# Altium PCB SNA.PcbDoc (part 5 of 6)
Units mm, origin at the board's own origin, x right, y up, seen from the top; angles counter-clockwise.
Board outline 122 x 98 mm, 4 copper layers (L1 Top Layer, L2 Inner 1, L3 Inner 2, L4 Bottom Layer), stack 1.588 mm thick; 466 components, 299 nets, 1366 pads, 4218 vias.
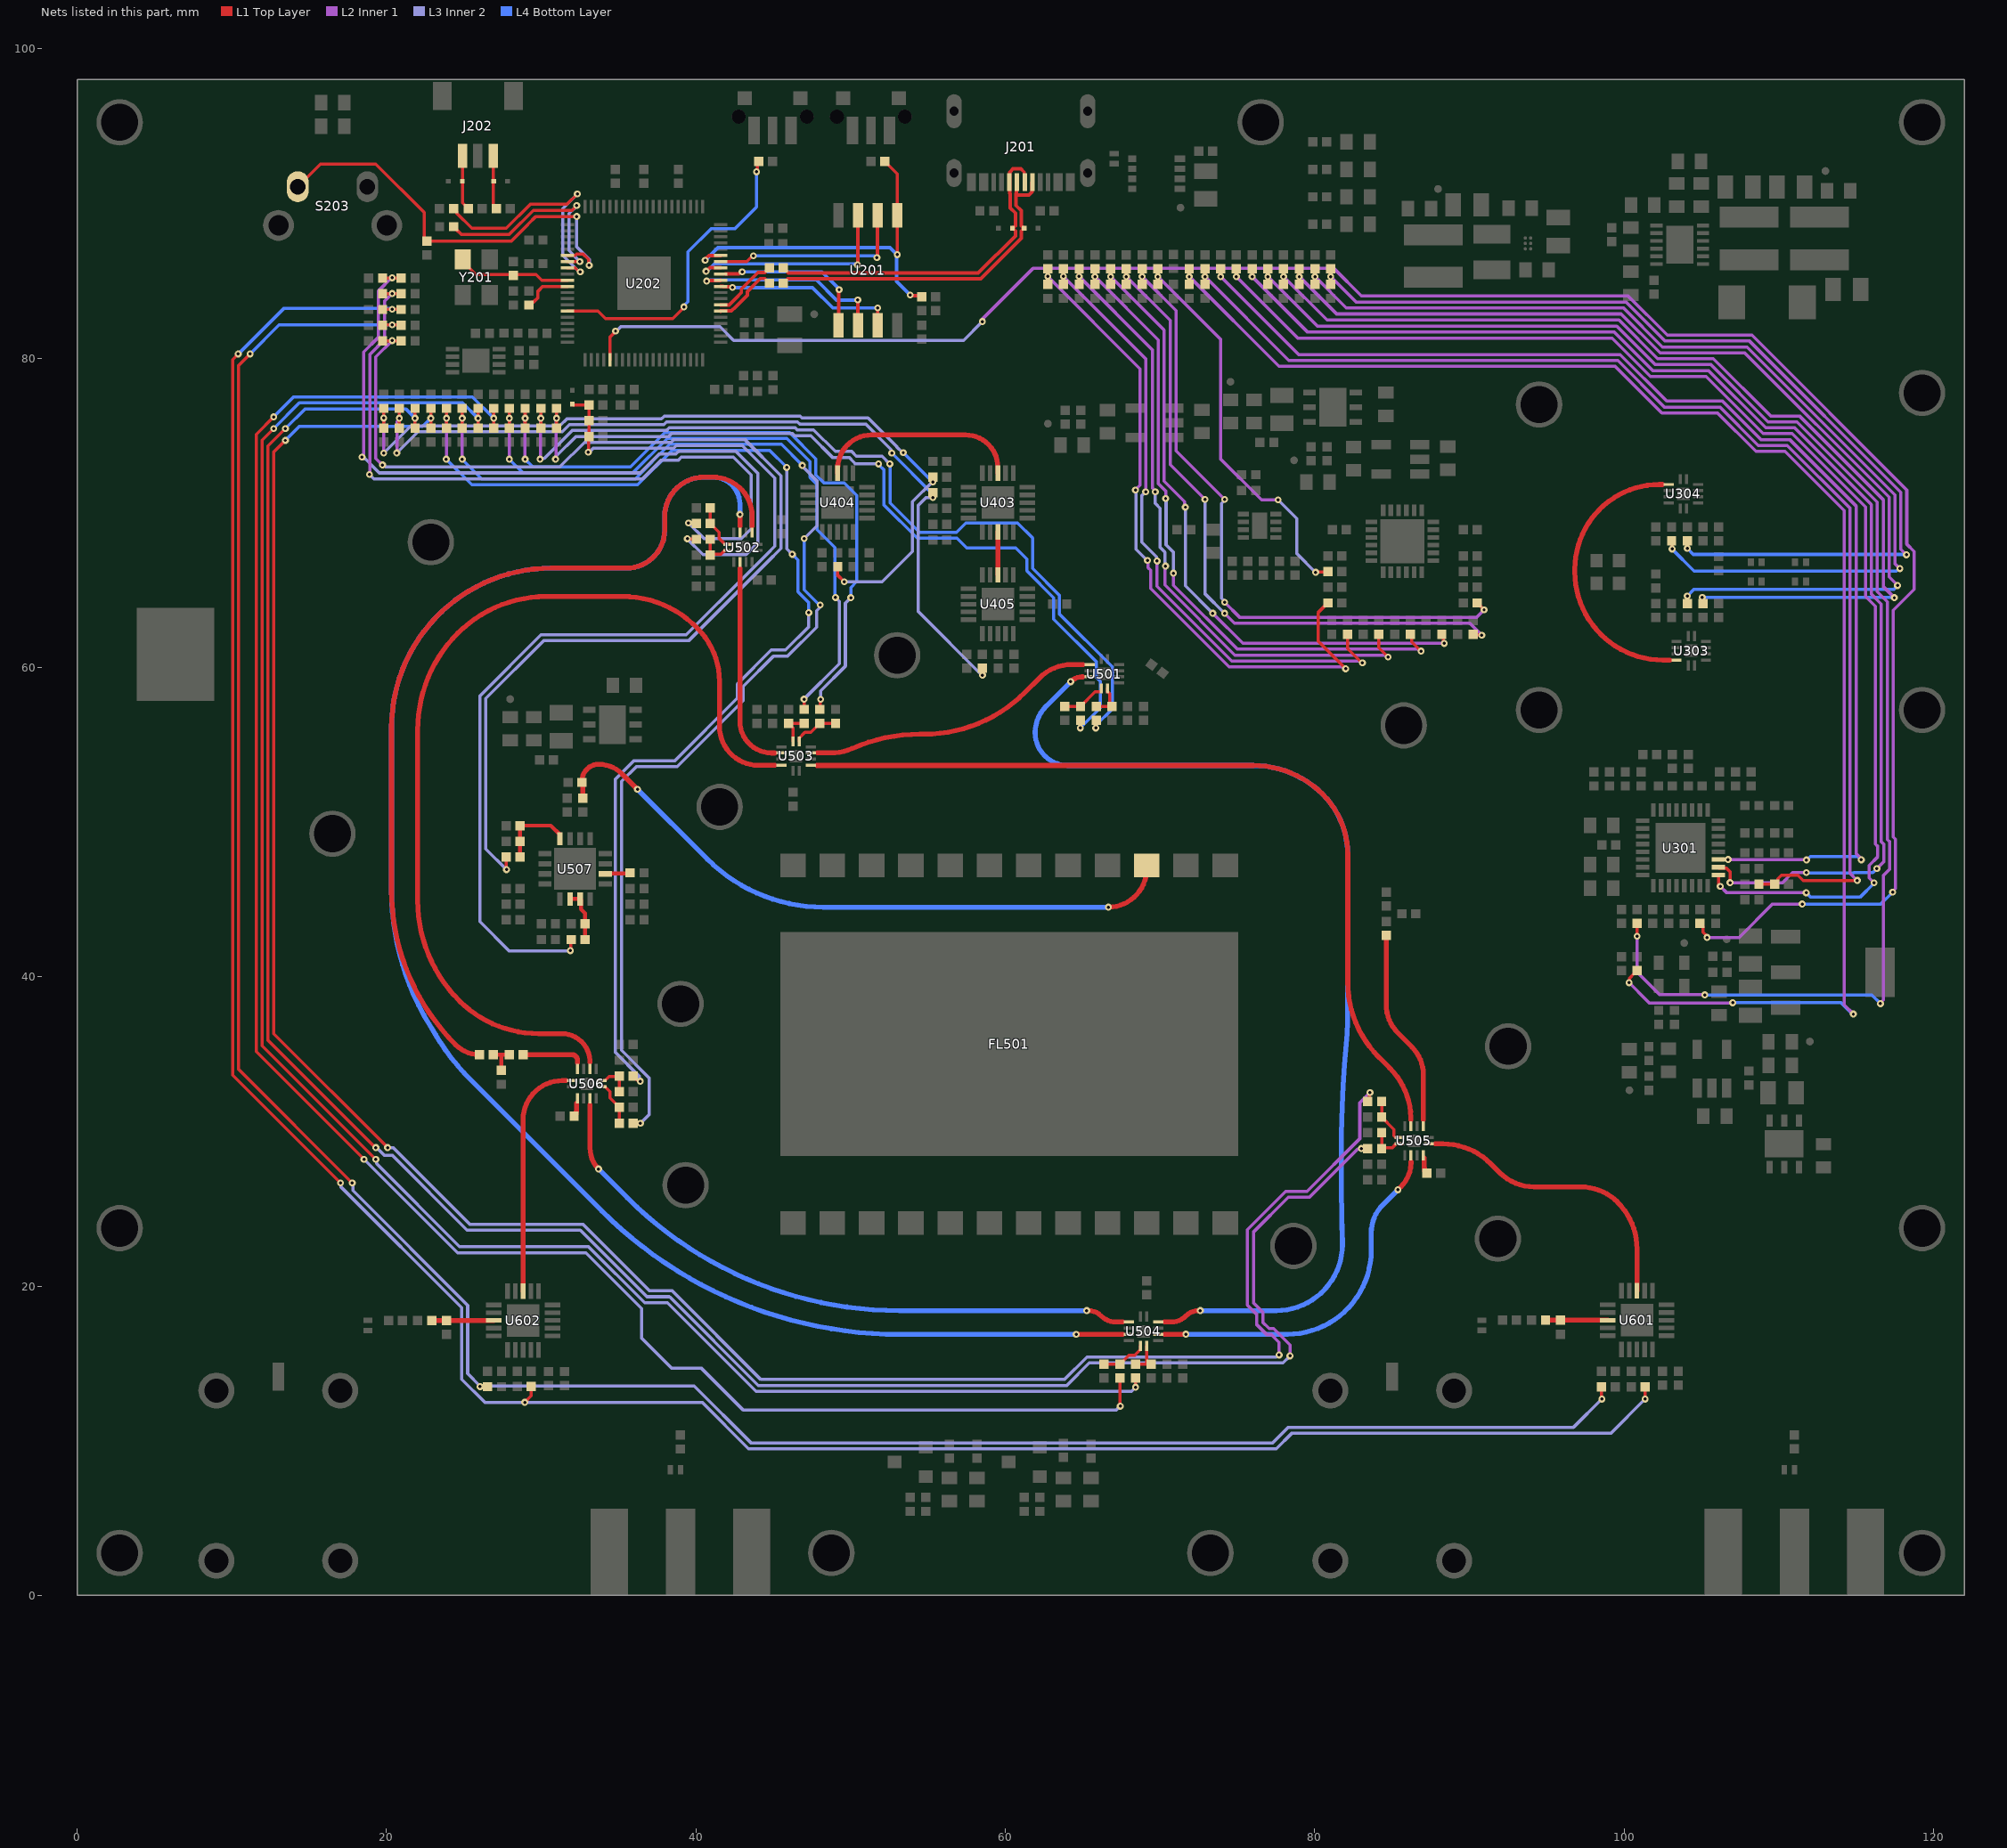
[diagram p7: the nets of this part, all layers, seen from the top]

## Via types
v1: diameter 0.45, hole 0.2, L1 Top Layer to L4 Bottom Layer, tented both sides, 4218 vias

## Nets (pads, with @x,y where several pads share a name; then routed paths per layer and width w, separated by ;. In a path a pad name is that pad's centre, name@x,y a point inside that pad or via, vN(x,y) a via of type N, cw(c..) or ccw(c..) an arc to the next point about the centre after c; other vN are vias at no path point) (continued)
NetR516_1: R516.1 R520.2 R524.2 | length 2
  L1 Top Layer w0.254: R516.1@26.908,34.962 27.416,34.962 ; R520.2@27.416,33.946 27.416,34.962 ; R524.2@27.924,34.962 27.416,34.962
NetR516_2: R516.2 U502.9 | length 58.3
  L1 Top Layer w0.32: R516.2@26.008,34.962 R516.2@26.008,34.962 cw(c26.007,37.147) 24.462,35.602 cw(c26.008,37.15) 24.461,35.603 cw(c34.482,45.61) 20.32,45.615 20.32,45.617 20.32,56.095 cw(c30.641,56.095) 30.641,66.417 35.512,66.417 ccw(c35.512,68.882) 37.978,68.882 37.978,69.76 cw(c40.518,69.76) 40.518,72.3 41.094,72.3 cw(c41.094,69.76) 43.634,69.76 43.634,69.468 43.634,69.291 43.634,69.134
NetR523_2: R523.2 U505.9 | length 12.7
  L1 Top Layer w0.32: R523.2@84.617,42.665 84.617,38.172 ccw(c87.157,38.172) 85.361,36.376 86.273,35.463 cw(c84.477,33.667) 87.017,33.667 87.017,30.765
NetR524_1: R524.1 U506.6 | length 3.9
  L1 Top Layer w0.32: R524.1@28.824,34.962 31.983,34.962 cw(c31.983,34.611) 32.335,34.611 cw(c30.898,34.447) 32.344,34.447
NetR529_2: R529.2 U505.6 | length 1
  L1 Top Layer w0.32: U505.6@87.076,28.286 87.076,27.871 87.076,27.64 87.104,27.612 87.104,27.453 R529.2@87.244,27.313
NetR530_2: R530.2 U506.9 | length 0.9
  L1 Top Layer w0.32: R530.2@32.123,30.988 32.262,31.127 32.262,31.289 32.289,31.315 U506.9@32.289,31.819
NetR539_1: R539.1 U507.10 | length 1.6
  L1 Top Layer w0.254: U507.10@34.136,46.652 34.172,46.687 35.707,46.687 R539.1@35.742,46.723
NetR605_1: R605.1 R607.2 U601.13 | length 4
  L1 Top Layer w0.32: R607.2@94.915,17.792 U601.13@98.924,17.792
NetR606_1: R606.1 R608.2 U602.13 | length 4
  L1 Top Layer w0.32: R608.2@22.915,17.78 R606.1@23.887,17.78 ; R606.1@23.887,17.78 U602.13@26.924,17.78
NetU303_6: U303.6 U304.9 | length 18.3
  L1 Top Layer w0.32: 102.458,71.826 102.3,71.826 102.281,71.826 ccw(c102.281,66.354) 96.81,66.354 96.81,66.169 ccw(c102.502,66.169) 102.502,60.476 102.808,60.476 102.947,60.476
NetU403_3: U403.3 U405.8 | length 2.8
  L1 Top Layer w0.32: U405.8@59.512,65.985 U403.3@59.512,68.753
NetU403_13: U403.13 U404.8 | length 13.5
  L1 Top Layer w0.32: U404.8@49.154,72.553 49.154,72.834 cw(c51.353,72.834) 49.205,73.303 cw(c51.353,72.834) 51.353,75.033 57.419,75.033 cw(c57.419,72.94) 59.204,74.034 cw(c57.419,72.94) 59.512,72.94 U403.13@59.512,72.553
NetU501_9: U501.9 U503.11 | length 18.7
  L1 Top Layer w0.32: 47.858,54.468 48.701,54.468 ccw(c48.701,57.93) 50.093,54.761 cw(c54.486,44.758) 54.486,55.683 54.741,55.683 54.742,55.683 ccw(c54.742,64.914) 61.27,58.387 62.198,59.316 cw(c64.308,57.208) 64.308,60.19 64.87,60.19 65.02,60.19
NetU501_11: U501.11 U504.6 | length 68.9
  L1 Top Layer w0.32: v1(64.221,59.08) cw(c64.971,58.33) 64.971,59.39 64.999,59.39 ; 70.278,17.682 70.729,17.682 ccw(c70.729,18.998) 71.66,18.067 cw(c72.504,17.223) v1@72.504,18.417
  L4 Bottom Layer w0.32: v1(64.221,59.08) 62.631,57.49 ccw(c64.335,55.783) 61.923,55.783 ccw(c64.044,55.783) 64.047,53.661 76.004,53.661 cw(c76.007,47.289) 80.511,51.796 cw(c76.613,47.893) 80.513,51.795 cw(c76.613,47.893) 82.129,47.887 82.129,37.764 cw(c57.913,37.764) 82.035,35.637 cw(c81.716,35.665) 82.035,35.633 ccw(c140.911,29.727) 81.77,31.628 ccw(c213.359,27.397) 81.786,22.699 cw(c81.466,22.689) 81.786,22.689 cw(c77.508,22.695) 77.508,18.417 v1(72.6,18.417)
NetU502_4: U502.4 U503.4 | length 13.3
  L1 Top Layer w0.32: 42.836,66.403 42.836,66.241 42.836,62.75 42.836,56.522 ccw(c44.891,56.522) 44.891,54.467 45.078,54.467
NetU502_11: U502.11 U504.11 | length 106.4
  L1 Top Layer w0.32: v1(42.836,69.897) 42.836,69.136 ccw(c42.672,69.412) 42.839,69.138 ; v1(64.571,16.877) 67.563,16.877 67.567,16.876
  L4 Bottom Layer w0.32: 22.753,36.936 cw(c36.998,45.609) 22.752,36.937 cw(c36.998,45.609) 20.32,45.616 20.32,56.095 cw(c30.641,56.095) 30.641,66.417 35.512,66.417 ccw(c35.512,68.882) 37.978,68.882 37.978,69.76 cw(c40.518,69.76) 40.518,72.3 41.094,72.3 cw(c41.094,70.558) 42.836,70.558 v1(42.836,69.897) ; 22.753,36.935 cw(c-129.68,-56.441) 23.171,36.25 ccw(c35.64,43.619) 23.171,36.249 ccw(c35.64,43.619) 25.409,33.367 33.906,24.87 ccw(c53.195,44.148) 53.195,16.877 53.205,16.877 v1(64.571,16.877)
NetU503_6: U503.6 U506.4 | length 63.7
  L1 Top Layer w0.32: 24.605,62.212 ccw(c30.859,55.959) 22.015,55.959 22.015,55.958 22.015,44.933 ccw(c31.186,44.931) 24.7,38.447 ccw(c29.823,43.568) 29.829,36.324 31.328,36.324 cw(c31.328,34.505) 33.144,34.611 cw(c31.328,34.505) 33.147,34.461 ; 24.606,62.213 cw(c30.332,56.487) 30.332,64.585 30.334,64.585 35.253,64.585 cw(c35.259,57.874) 40.094,62.528 cw(c36.678,59.103) 41.515,59.1 41.515,56.194 ccw(c44.042,56.194) 44.042,53.667 44.947,53.667 45.092,53.667
NetU503_9: U503.9 U505.11 | length 55.8
  L1 Top Layer w0.32: 47.832,53.661 47.997,53.661 76.005,53.661 76.006,53.661 ; 76.006,53.663 cw(c76.01,47.294) 80.513,51.799 cw(c76.613,47.895) 82.131,47.889 82.131,39.654 ; 82.131,39.652 82.131,39.651 ccw(c88.976,39.644) 84.136,34.804 84.137,34.803 84.831,34.109 84.832,34.108 cw(c81.488,30.764) 86.215,30.921 cw(c81.488,30.764) 86.217,30.762
NetU504_4: U504.4 U505.4 | length 23
  L1 Top Layer w0.32: 70.295,16.877 70.953,16.877 71.659,16.877 v1(71.671,16.889) ; v1(85.373,26.231) 85.559,26.417 ccw(c83.955,28.021) 86.218,27.871 ccw(c83.955,28.021) 86.223,28.016 cw(c86.517,28.121) 86.222,28.02
  L4 Bottom Layer w0.32: v1(71.671,16.889) 78.225,16.889 ccw(c78.225,22.311) 83.647,22.311 83.647,23.453 cw(c86.187,23.453) 84.391,25.249 v1(85.373,26.231)
NetU504_9: U504.9 U506.11 | length 41
  L1 Top Layer w0.32: 33.149,31.723 33.15,31.563 33.15,31.561 33.15,28.911 ccw(c35.046,28.911) v1(33.706,27.57) ; v1@65.355,18.419 cw(c65.355,17.225) 66.199,18.069 ccw(c67.13,19) 67.13,17.683 67.581,17.683
  L4 Bottom Layer w0.32: v1(33.706,27.57) 35.579,25.696 35.581,25.695 ccw(c53.148,43.262) 53.148,18.419 53.149,18.419 v1(65.259,18.419)
NetU505_7: U505.7 U601.8 | length 18.9
  L1 Top Layer w0.32: 87.795,29.196 87.942,29.196 88.269,29.196 88.272,29.196 cw(c88.271,24.799) 91.38,27.908 91.381,27.907 91.954,27.334 91.956,27.333 ccw(c94.172,29.549) 94.172,26.415 94.173,26.415 97.185,26.415 97.186,26.415 cw(c97.188,23.046) 99.568,25.43 cw(c96.545,22.401) 99.569,25.428 cw(c96.545,22.401) 100.824,22.398 100.824,21.213 U601.8@100.824,19.692
NetU506_7: U506.7 U602.8 | length 15.3
  L1 Top Layer w0.32: U602.8@28.824,19.68 28.824,30.747 cw(c31.364,30.747) 31.364,33.287 31.584,33.287
QSPI_SCLK: U201.6 U202.71 | length 12.9
  L1 Top Layer w0.228: v1(40.689,84.98) 40.73,85.021 41.578,85.021 U202.71@41.591,85.035 ; v1(50.455,83.757) 50.466,83.746 50.466,82.136 U201.6@50.477,82.125
  L4 Bottom Layer w0.228: v1(40.689,84.98) 40.731,85.022 40.889,85.022 40.921,85.055 47.787,85.055 49.085,83.757 v1(50.455,83.757)
QSPI_SD0: U201.5 U202.72 | length 10.2
  L1 Top Layer w0.228: U202.72@41.903,85.435 42.564,85.435 42.783,85.435 42.923,85.575 v1(42.983,85.575) ; U201.5@49.207,82.125 49.231,82.148 49.231,84.398 v1(49.254,84.421)
  L4 Bottom Layer w0.228: v1(42.983,85.575) 48.14,85.575 49.254,84.461 v1(49.254,84.421)
QSPI_SD1: U201.2 U202.74 | length 13.1
  L1 Top Layer w0.228: U202.74@41.591,86.235 43.281,86.235 43.655,86.609 v1(43.708,86.609) ; v1(51.699,86.499) 51.723,86.523 51.723,89.201 U201.2@51.747,89.225
  L4 Bottom Layer w0.228: v1(43.708,86.609) 51.528,86.609 51.639,86.499 v1(51.699,86.499)
QSPI_SD2: U201.3 U202.73 | length 14.3
  L1 Top Layer w0.228: v1(40.653,85.611) 40.665,85.611 40.89,85.835 U202.73@41.591,85.835 ; v1(50.44,86.023) 50.459,86.041 50.459,89.206 U201.3@50.477,89.225
  L4 Bottom Layer w0.228: v1(40.653,85.611) 40.709,85.611 41.189,86.091 42.564,86.091 50.311,86.091 50.379,86.023 v1(50.44,86.023)
QSPI_SD3: U201.7 U202.70 | length 11.8
  L1 Top Layer w0.228: U202.70@41.591,84.635 41.747,84.635 41.761,84.621 42.239,84.621 42.299,84.561 v1(42.359,84.561) ; v1(51.742,83.241) 51.745,83.238 51.745,82.127 U201.7@51.747,82.125
  L4 Bottom Layer w0.228: v1(42.359,84.561) 42.564,84.561 47.519,84.561 48.839,83.241 v1(51.742,83.241)
QSPI_SS: R202.1 R206.1 U201.1 U202.75 | length 24.3
  L1 Top Layer w0.203: R202.1@52.208,92.71 53.017,91.901 U201.1@53.017,89.225
  L1 Top Layer w0.228: v1(40.596,86.317) 40.639,86.36 40.639,86.442 40.832,86.635 U202.75@41.591,86.635 ; v1(53.006,86.688) 53.012,86.693 53.012,89.219 U201.1@53.017,89.225 ; v1(53.848,84.074) 53.891,84.031 54.52,84.031 R206.1@54.591,83.96
  L4 Bottom Layer w0.228: v1(40.596,86.317) 41.431,87.152 42.564,87.152 52.547,87.152 53.006,86.692 v1(53.006,86.688) 52.975,86.656 52.975,84.947 v1(53.848,84.074)
RF_Attenuator.D0: C407.2 R232.2 R407.2 | length 42.4
  L1 Top Layer w0.203: C407.2@68.834,84.761 v1(68.834,85.269) R232.2@68.834,85.777 ; R407.2@90.492,64.167 v1(90.942,63.717)
  L2 Inner 1 w0.203: v1(68.834,85.269) 71.034,83.069 71.034,74 v1(74.168,70.866) ; v1(74.168,64.214) 75.136,63.246 90.471,63.246 v1(90.942,63.717)
  L3 Inner 2 w0.203: v1(74.168,64.214) 74.168,64.28 73.974,64.474 73.974,70.605 74.168,70.799 v1(74.168,70.866)
RF_Attenuator.D1: C406.2 R233.2 R406.2 | length 43.2
  L1 Top Layer w0.203: C406.2@67.818,84.761 v1(67.818,85.269) R233.2@67.818,85.777 ; R406.2@90.238,62.135 90.268,62.105 90.766,62.105 v1(90.795,62.076)
  L2 Inner 1 w0.203: v1(67.818,85.269) 70.653,82.434 70.653,73.111 v1(72.898,70.866) ; v1(74.168,63.5) 74.168,63.495 74.798,62.865 90.018,62.865 v1@90.795,62.088
  L3 Inner 2 w0.203: v1@72.893,70.861 72.893,64.769 74.163,63.5 v1(74.168,63.5)
RF_Attenuator.D2: C405.2 R234.2 R405.2 | length 41.9
  L1 Top Layer w0.203: C405.2@66.802,84.761 v1(66.802,85.269) R234.2@66.802,85.777 ; R405.2@88.206,62.135 88.319,62.022 88.319,61.597 v1(88.366,61.55)
  L2 Inner 1 w0.203: v1(66.802,85.269) 70.258,81.813 70.258,72.041 71.581,70.719 71.581,70.405 v1(71.628,70.358) ; v1(73.406,63.5) 75.348,61.558 v1@88.359,61.558
  L3 Inner 2 w0.203: v1(71.628,70.358) 71.628,65.278 v1(73.406,63.5)
RF_Attenuator.D3: C404.2 R235.2 R404.2 | length 42.2
  L1 Top Layer w0.203: C404.2@65.786,84.761 v1(65.786,85.269) R235.2@65.786,85.777 ; R404.2@86.174,62.135 86.267,62.042 86.267,61.649 v1(86.863,61.053)
  L2 Inner 1 w0.203: v1(65.786,85.269) 69.877,81.178 69.877,71.883 70.365,71.396 v1@70.365,70.923 ; v1(70.86,66.091) 70.86,65.315 74.998,61.177 86.673,61.177 86.796,61.053 v1(86.863,61.053)
  L3 Inner 2 w0.203: v1(70.356,70.915) 70.386,70.886 70.386,67.927 70.86,67.453 v1(70.86,66.091)
RF_Attenuator.D4: C403.2 R236.2 R403.2 | length 41.4
  L1 Top Layer w0.203: C403.2@64.77,84.761 R236.2@64.77,85.777 ; R403.2@84.142,62.135 84.142,61.27 v1(84.739,60.672)
  L2 Inner 1 w0.203: v1(64.77,85.273) 64.77,85.269 69.496,80.543 69.496,71.618 69.693,71.421 v1(69.693,71.354) ; v1(70.349,66.549) 70.307,66.507 70.307,65.329 74.84,60.796 84.549,60.796 84.673,60.672 v1(84.739,60.672)
  L3 Inner 2 w0.203: v1@69.692,71.353 69.692,70.598 70.005,70.286 70.005,67.766 70.322,67.449 70.322,66.576 v1(70.349,66.549)
RF_Attenuator.D5: C402.2 R237.2 R402.2 | length 41.4
  L1 Top Layer w0.203: C402.2@63.754,84.761 R237.2@63.754,85.777 ; R402.2@82.11,62.135 82.11,61.224 83.042,60.291 v1(83.077,60.291)
  L2 Inner 1 w0.203: v1(63.754,85.273) 63.754,85.269 69.088,79.935 69.088,71.378 v1(69.066,71.356) ; v1(69.808,66.88) 69.794,66.866 69.794,65.249 74.628,60.415 82.887,60.415 83.01,60.291 v1(83.077,60.291)
  L3 Inner 2 w0.203: v1(69.066,71.356) 68.818,71.108 68.818,68.089 69.76,67.146 69.76,66.927 v1(69.808,66.88)
RF_Attenuator.D6: C401.2 R238.2 R401.2 | length 44.2
  L1 Top Layer w0.203: C401.2@62.738,84.761 R238.2@62.738,85.777 ; R401.2@80.84,64.167 80.205,63.532 80.205,61.702 v1(81.997,59.91)
  L2 Inner 1 w0.203: v1(62.738,85.273) 62.738,85.269 68.707,79.3 68.707,71.773 v1(68.402,71.468) ; v1(69.181,66.918) 69.228,66.87 69.228,66.445 69.387,66.286 69.387,65.11 74.463,60.034 81.806,60.034 81.93,59.91 v1(81.997,59.91)
  L3 Inner 2 w0.203: v1(68.402,71.468) 68.437,71.433 68.437,67.644 69.163,66.918 v1(69.181,66.918)
RF_Attenuator.LE: C408.2 R231.2 R408.2 | length 25.8
  L1 Top Layer w0.203: C408.2@69.85,84.703 C408.2@69.85,84.761 v1(69.85,85.269) R231.2@69.85,85.719 ; v1(80.05,66.148) 80.076,66.174 80.814,66.174 R408.2@80.84,66.199
  L2 Inner 1 w0.203: v1(69.85,85.269) 73.901,81.218 73.901,73.482 76.554,70.83 77.616,70.83 v1(77.621,70.835)
  L3 Inner 2 w0.203: v1(77.621,70.835) 78.775,69.681 78.834,69.622 78.834,68.156 78.834,67.364 v1(80.05,66.148)
RF_COUPLED: C522.1 FL501.15 R535.2 | length 43.2
  L1 Top Layer w0.32: C522.1@32.694,51.549 32.694,52.507 ccw(c32.636,52.507) R535.2@32.636,52.565 32.633,52.705 cw(c33.717,52.655) 33.717,53.74 cw(c33.717,51.615) 35.221,53.116 v1(36.219,52.118) ; v1(66.657,44.502) ccw(c66.657,46.977) 69.132,46.977 FL501.15@69.132,47.2
  L4 Bottom Layer w0.32: v1(36.219,52.118) 40.721,47.616 40.722,47.615 ccw(c48.238,55.131) 48.238,44.502 48.239,44.502 v1(66.657,44.502)
RF_DET_EN: C524.2 R536.2 R538.1 U507.16 | length 5.1
  L1 Top Layer w0.254: R538.1@28.63,47.739 R536.2@28.63,48.755 C524.2@28.63,49.771 30.617,49.771 31.211,49.177 U507.16@31.211,48.927
RF_DET_OUT: C523.2 R537.1 U507.6 U507.7 | length 3.4
  L1 Top Layer w0.254: U507.6@31.861,45.027 U507.7@32.511,45.027 32.559,44.979 32.559,44.375 32.832,44.102 C523.2@32.832,43.421 R537.1@32.832,42.405
RF_Detector.EN: C528.2 R210.1 R538.2 | length 77.6
  L1 Top Layer w0.203: C528.2@19.561,81.11 C528.2@19.746,81.11 ; C528.2@19.928,81.11 19.937,81.119 20.358,81.119 v1(20.367,81.127) 20.376,81.119 20.935,81.119 R210.1@20.944,81.11 ; R538.2@27.73,47.739 27.741,47.728 27.741,46.939 v1(27.751,46.928)
  L2 Inner 1 w0.203: 19.307,76.326 19.307,73.518 v1(19.74,73.085) ; 19.308,76.327 19.308,80.068 v1(20.367,81.127)
  L3 Inner 2 w0.203: v1(19.74,73.085) 19.807,73.085 19.936,72.956 31.198,72.956 32.794,74.551 38.396,74.551 38.576,74.731 43.15,74.731 45.491,72.39 45.491,67.69 44.561,66.759 44.042,66.241 39.523,61.722 30.145,61.722 26.416,57.993 26.416,48.26 27.748,46.928 v1(27.751,46.928)
RF_Detector.OUT: C204.2 C527.2 D205.1 R211.1 R537.2 | length 66.7
  L1 Top Layer w0.203: v1(31.877,41.689) 31.905,41.716 31.905,42.377 R537.2@31.932,42.405 ; D205.1@32.004,77.02 32.062,76.962 R211.1@33.078,76.962 C527.2@33.078,75.946 C204.2@33.078,74.93 33.06,74.912 33.06,73.935 v1(33.043,73.918)
  L3 Inner 2 w0.203: v1(31.877,41.689) 31.844,41.656 27.94,41.656 26.035,43.561 26.035,58.15 29.988,62.103 39.366,62.103 43.503,66.241 44.561,67.298 45.101,67.838 45.101,72.241 42.992,74.35 38.733,74.35 38.553,74.17 33.362,74.17 33.109,73.918 v1(33.043,73.918)
RF_SRC.CE: C303.2 R220.1 R303.1 R304.2 | length 80
  L1 Top Layer w0.203: C303.2@72.898,84.761 v1(72.898,85.269) R220.1@72.898,85.777 ; R304.2@108.705,45.987 R303.1@109.721,45.987 109.92,46.186 109.92,46.325 110.162,46.567 111.231,46.567 111.569,46.228 v1(115.062,46.228)
  L2 Inner 1 w0.203: v1(72.898,85.269) 78.327,79.84 99.584,79.84 102.589,76.835 106.187,76.835 108.671,74.351 110.537,74.351 114.603,70.285 114.603,46.687 v1(115.062,46.228)
RF_SRC.CLK: R218.1 U301.1 | length 83.8
  L1 Top Layer w0.203: v1(74.93,85.269) R218.1@74.93,85.777 ; U301.1@106.087,46.582 106.087,45.963 v1(106.205,45.845)
  L2 Inner 1 w0.203: v1(74.93,85.269) 78.907,81.292 99.209,81.292 101.69,78.812 105.288,78.812 108.987,75.113 110.853,75.113 115.596,70.37 115.596,64.583 116.235,63.943 116.235,48.576 116.388,48.423 116.388,47.76 115.828,47.199 115.828,46.392 v1(116.149,46.07) ; v1(106.205,45.845) 106.212,45.845 106.63,45.427 v1(111.762,45.427)
  L4 Bottom Layer w0.203: v1(111.762,45.427) 112.049,45.139 115.238,45.139 116.149,46.051 v1(116.149,46.07)
RF_SRC.DATA: R217.1 U301.2 | length 82.2
  L1 Top Layer w0.203: v1(75.946,85.269) R217.1@75.946,85.777 ; U301.2@106.087,47.082 106.135,47.033 106.605,47.033 106.837,46.802 v1(106.837,46.085)
  L2 Inner 1 w0.203: v1(75.946,85.269) 79.539,81.676 99.364,81.676 101.848,79.193 105.446,79.193 109.144,75.494 111.011,75.494 115.977,70.528 115.977,64.74 116.616,64.101 116.616,48.734 116.769,48.581 116.769,47.427 v1(116.332,46.99) ; v1(106.837,46.085) 106.858,46.063 110.215,46.063 110.888,46.736 v1(111.775,46.736)
  L4 Bottom Layer w0.203: v1(111.775,46.736) 111.795,46.716 114.836,46.716 114.853,46.732 116.074,46.732 v1(116.332,46.99)
RF_SRC.LD: C301.2 R221.1 R301.2 | length 98.7
  L1 Top Layer w0.203: C301.2@71.882,84.761 v1(71.882,85.269) R221.1@71.882,85.777 ; v1(100.314,39.618) 100.355,39.66 100.355,39.92 100.633,40.198 100.633,40.201 R301.2@100.831,40.399
  L2 Inner 1 w0.203: v1(71.882,85.269) 77.68,79.471 78.157,79.471 78.169,79.459 99.426,79.459 102.431,76.454 106.029,76.454 108.513,73.97 110.38,73.97 114.21,70.14 114.21,38.19 v1(114.808,37.592) ; v1(100.314,39.618) 101.453,38.479 101.618,38.314 v1@107.009,38.314
  L4 Bottom Layer w0.203: v1(107.009,38.316) 114.017,38.316 114.741,37.592 v1(114.808,37.592)
RF_SRC.LE: R219.1 U301.3 | length 80.2
  L1 Top Layer w0.203: v1(73.914,85.269) R219.1@73.914,85.777 ; U301.3@106.088,47.581 v1(106.714,47.58)
  L2 Inner 1 w0.203: v1(73.914,85.269) 78.962,80.221 99.742,80.221 102.747,77.216 106.345,77.216 108.829,74.732 110.695,74.732 114.984,70.443 114.984,47.964 115.323,47.625 v1(115.323,47.559) ; v1(106.714,47.58) 106.729,47.565 111.768,47.565 v1(111.783,47.55)
  L4 Bottom Layer w0.203: v1(111.783,47.55) 111.802,47.55 112.025,47.774 115.081,47.774 115.296,47.559 v1(115.323,47.559)
RF_SRC.MUX: R314.1 U202.45 | length 135.1
  L1 Top Layer w0.203: U202.45@34.441,79.885 34.441,81.357 34.801,81.717 v1(34.801,81.747) ; R314.1@104.895,43.447 105.094,43.249 105.094,42.871 105.355,42.61 v1(105.355,42.544)
  L2 Inner 1 w0.203: v1(58.506,82.359) 58.553,82.407 58.553,82.567 61.778,85.792 81.242,85.792 83.006,84.029 100.245,84.029 102.795,81.479 108.259,81.479 118.263,71.475 118.263,67.971 118.745,67.489 118.745,65.039 117.395,63.689 117.395,49.033 117.531,48.897 117.531,45.708 117.348,45.525 v1(117.348,45.466) ; v1(105.355,42.544) 105.362,42.536 107.425,42.536 109.593,44.704 v1(111.506,44.704)
  L3 Inner 2 w0.203: v1(34.801,81.747) 34.868,81.747 35.147,82.026 41.556,82.026 42.434,81.149 42.564,81.149 57.295,81.149 v1(58.506,82.359)
  L4 Bottom Layer w0.203: v1(111.506,44.704) 116.586,44.704 v1(117.348,45.466)
RF_SRC.RFOUT_EN: C330.2 R216.1 R302.2 | length 99.2
  L1 Top Layer w0.203: C330.2@76.962,84.761 v1(76.962,85.269) R216.1@76.962,85.777 ; v1(100.83,42.615) R302.2@100.831,43.447
  L2 Inner 1 w0.203: v1(76.962,85.269) 80.171,82.06 99.519,82.06 102.005,79.574 105.604,79.574 109.302,75.875 111.169,75.875 116.358,70.686 116.358,64.898 117.014,64.242 117.014,48.875 117.15,48.739 117.15,46.953 116.75,46.552 116.75,38.505 116.564,38.319 v1(116.564,38.263) ; v1(100.83,42.615) 100.833,42.612 100.833,40.299 102.272,38.86 105.175,38.86 v1(105.206,38.829)
  L4 Bottom Layer w0.203: v1(105.206,38.829) 115.998,38.829 v1(116.564,38.263)
RF_SW_CPLR_1.C1: C508.2 R252.2 R503.1 | length 51
  L1 Top Layer w0.203: C508.2@19.928,85.174 19.937,85.183 20.358,85.183 v1(20.367,85.191) 20.376,85.183 20.935,85.183 R252.2@20.944,85.174 ; v1(39.44,68.323) 39.476,68.286 R503.1@40.017,68.286
  L2 Inner 1 w0.203: v1(18.411,73.592) 18.411,73.659 18.52,73.768 18.52,80.393 19.482,81.355 19.482,84.349 20.324,85.191 v1(20.367,85.191)
  L3 Inner 2 w0.203: v1(18.411,73.592) 18.477,73.592 18.594,73.475 18.637,73.475 19.537,72.575 36.364,72.575 36.37,72.581 36.397,72.581 37.605,73.789 38.711,73.789 38.891,73.969 42.578,73.969 43.987,72.56 43.987,69.291 43.987,68.039 43.234,67.287 41.511,67.287 40.448,67.287 39.44,68.296 v1(39.44,68.323)
RF_SW_CPLR_1.C1_LV: R503.2 R506.1 U502.2 | length 2.1
  L1 Top Layer w0.203: R503.2@40.917,68.286 40.917,67.352 R506.1@40.917,67.27 40.967,67.32 41.511,67.32 41.618,67.32 U502.2@41.862,67.564
RF_SW_CPLR_1.C2: C504.2 R253.2 R504.1 | length 47.9
  L1 Top Layer w0.203: C504.2@19.928,84.158 19.937,84.167 20.358,84.167 v1(20.367,84.175) 20.376,84.167 20.935,84.167 R253.2@20.944,84.158 ; v1(39.518,69.337) 39.553,69.302 R504.1@40.017,69.302
  L2 Inner 1 w0.203: v1(18.891,72.477) 18.915,72.501 18.915,80.232 19.863,81.18 19.863,83.671 v1(20.367,84.175)
  L3 Inner 2 w0.203: v1(18.891,72.477) 19.174,72.194 36.522,72.194 36.528,72.2 36.555,72.2 37.763,73.408 38.869,73.408 39.049,73.588 42.42,73.588 43.569,72.439 43.569,69.291 43.569,68.969 42.926,68.326 40.529,68.326 v1(39.518,69.337)
RF_SW_CPLR_1.C2_LV: R504.2 R508.1 U502.1 | length 3
  L1 Top Layer w0.203: R508.1@40.917,70.318 R504.2@40.917,69.302 41.497,68.723 41.497,68.333 41.511,68.319 41.864,67.966 U502.1@42.086,67.966
RF_SW_CPLR_2.C1: C507.2 R250.2 R501.1 | length 56.9
  L1 Top Layer w0.203: C507.2@29.972,75.479 v1(29.972,76.114) R250.2@29.972,76.749 ; v1(65.84,56.082) 65.857,56.099 65.857,56.555 R501.1@65.874,56.572
  L2 Inner 1 w0.203: v1(29.924,73.46) 29.962,73.498 v1@29.962,76.104
  L3 Inner 2 w0.203: v1(29.924,73.46) 29.971,73.507 30.192,73.507 31.998,75.313 38.08,75.313 38.26,75.493 46.413,75.493 46.547,75.359 47.606,75.359 49.003,73.962 50.059,73.962 50.362,73.659 52.022,73.659 v1(52.529,73.152)
  L4 Bottom Layer w0.203: v1(52.529,73.152) 52.55,73.131 52.55,70.64 54.455,68.735 56.832,68.735 57.435,69.338 60.791,69.338 61.761,68.368 61.761,66.4 63.5,64.661 63.5,63.449 66.914,60.035 66.914,57.313 65.887,56.286 65.887,56.13 v1(65.84,56.082)
RF_SW_CPLR_2.C1_LV: R501.2 R505.1 U501.2 | length 2.3
  L1 Top Layer w0.203: R501.2@65.874,57.472 R505.1@66.89,57.472 66.743,57.619 66.743,58.065 66.743,58.296 66.622,58.417 66.596,58.417 66.595,58.419 U501.2@66.595,58.64
RF_SW_CPLR_2.C2: C503.2 R251.2 R502.1 | length 53.8
  L1 Top Layer w0.203: C503.2@30.988,75.479 v1(30.988,76.114) R251.2@30.988,76.749 ; v1(64.847,56.084) 64.852,56.09 64.852,56.566 R502.1@64.858,56.572
  L2 Inner 1 w0.203: v1(30.917,73.46) 30.953,73.495 30.953,76.079 v1(30.988,76.114)
  L3 Inner 2 w0.203: v1(30.917,73.46) 30.964,73.507 30.964,73.652 32.244,74.932 38.238,74.932 38.418,75.112 46.255,75.112 46.389,74.978 47.423,74.978 48.82,73.581 49.902,73.581 50.198,73.285 50.198,73.271 50.317,73.152 v1(51.804,73.152)
  L4 Bottom Layer w0.203: v1(51.804,73.152) 51.804,73.113 52.159,72.758 52.159,70.492 54.297,68.354 56.868,68.354 57.498,67.724 60.663,67.724 61.38,67.007 61.38,66.242 63.119,64.503 63.119,63.119 65.892,60.346 65.892,59.343 66.149,59.086 66.149,57.387 v1(64.847,56.084)
RF_SW_CPLR_2.C2_LV: R502.2 R507.1 U501.1 | length 3
  L1 Top Layer w0.203: R507.1@63.842,57.472 R502.2@64.858,57.472 65.803,58.417 66.193,58.417 66.195,58.419 U501.1@66.195,58.64
RF_SW_CPLR_3.C1: C513.2 R248.2 R513.1 | length 43
  L1 Top Layer w0.203: C513.2@27.94,75.479 v1(27.94,76.114) R248.2@27.94,76.749 ; v1(46.983,57.948) 46.988,57.943 46.988,57.29 R513.1@46.993,57.285
  L2 Inner 1 w0.203: v1(27.94,73.46) v1(27.94,76.114)
  L3 Inner 2 w0.203: v1(46.983,57.948) 49.276,60.241 49.276,64.262 v1(49.022,64.516)
  L4 Bottom Layer w0.203: v1(27.94,73.46) 28.825,72.575 35.919,72.575 38.147,74.803 45.875,74.803 47.371,73.307 47.371,72.29 47.836,71.825 47.836,71.369 47.836,69.845 47.836,68.896 48.99,67.743 48.99,64.548 v1(49.022,64.516)
RF_SW_CPLR_3.C1_LV: R513.2 R518.1 U503.2 | length 2.3
  L1 Top Layer w0.203: U503.2@46.272,55.217 46.272,56.09 R518.1@45.977,56.385 R513.2@46.993,56.385
RF_SW_CPLR_3.C2: C511.2 R249.2 R514.1 | length 43.6
  L1 Top Layer w0.203: C511.2@28.956,75.479 v1(28.956,76.114) R249.2@28.956,76.749 ; R514.1@48.009,57.285 48.033,57.31 48.033,57.913 v1(48.057,57.937)
  L2 Inner 1 w0.203: v1(28.956,73.46) 28.932,73.484 28.932,76.09 v1(28.956,76.114)
  L3 Inner 2 w0.203: v1(48.057,57.937) 48.057,58.484 49.657,60.083 49.657,64.161 v1(50.009,64.513)
  L4 Bottom Layer w0.203: v1(28.956,73.46) 29.46,72.956 35.761,72.956 37.99,75.184 46.054,75.184 47.752,73.486 47.752,72.448 48.271,71.928 49.588,71.928 50.392,71.125 50.392,70.004 50.398,69.998 50.398,65.557 50.009,65.167 v1(50.009,64.513)
RF_SW_CPLR_3.C2_LV: R514.2 R522.1 U503.1 | length 3
  L1 Top Layer w0.203: U503.1@46.672,55.217 46.672,55.439 47.04,55.806 47.429,55.806 R514.2@48.009,56.385 R522.1@49.025,56.385
RF_SW_CPLR_4.C1: C512.2 R246.2 R511.1 | length 122.3
  L1 Top Layer w0.203: v1(12.7,75.438) 11.953,74.691 11.953,35.545 v1(19.304,28.194) ; C512.2@25.908,75.479 v1(25.908,76.114) R246.2@25.908,76.749 ; v1(68.412,13.464) R511.1@68.412,14.058
  L3 Inner 2 w0.203: v1(19.304,28.194) 19.351,28.147 19.351,27.924 24.713,22.562 33.044,22.562 36.685,18.921 38.153,18.921 43.875,13.199 68.147,13.199 v1(68.412,13.464)
  L4 Bottom Layer w0.203: v1(12.7,75.438) 14.363,77.101 24.921,77.101 v1(25.908,76.114)
RF_SW_CPLR_4.C1_LV: R511.2 R517.1 U504.2 | length 2.2
  L1 Top Layer w0.203: R511.2@68.412,14.958 R517.1@69.131,14.958 ; U504.2@69.132,16.127 69.131,16.125 R517.1@69.131,14.958 ; R517.1@69.428,14.958 R517.1@69.131,14.958
RF_SW_CPLR_4.C2: C510.2 R247.2 R512.1 | length 126.6
  L1 Top Layer w0.203: v1(12.7,76.2) 11.572,75.072 11.572,35.164 v1(18.542,28.194) ; C510.2@26.924,75.479 v1(26.924,76.114) R247.2@26.924,76.749 ; R512.1@67.396,14.058 67.409,14.045 67.409,12.25 v1(67.422,12.237)
  L3 Inner 2 w0.203: v1(18.542,28.194) 24.587,22.149 32.888,22.149 36.488,18.549 36.488,16.632 38.441,14.679 40.358,14.679 43.038,11.999 67.18,11.999 67.418,12.237 v1(67.422,12.237)
  L4 Bottom Layer w0.203: v1(12.7,76.2) 13.986,77.486 25.552,77.486 v1(26.924,76.114)
RF_SW_CPLR_4.C2_LV: R512.2 R521.1 U504.1 | length 3
  L1 Top Layer w0.203: R521.1@66.38,14.958 R512.2@67.396,14.958 67.975,15.538 68.365,15.538 68.732,15.905 U504.1@68.732,16.127
RF_SW_CPLR_5.C1: C518.2 R244.2 R527.1 | length 76.9
  L1 Top Layer w0.203: C518.2@23.876,75.479 v1(23.876,76.114) R244.2@23.876,76.749 ; R527.1@35.945,33.585 36.242,33.288 36.353,33.288 v1(36.4,33.241)
  L2 Inner 1 w0.203: v1(23.86,73.46) 23.86,73.442 v1@23.876,73.425 ; v1@23.876,73.406 v1@23.876,73.425 ; v1(23.876,76.114) v1@23.876,73.425
  L3 Inner 2 w0.203: v1(36.4,33.241) 36.355,33.286 36.355,33.539 34.798,35.095 34.798,52.779 35.994,53.975 38.635,53.975 42.671,58.011 42.671,58.927 44.865,61.121 45.781,61.121 47.294,62.634 v1(47.294,63.542) ; v1(45.865,72.929) 45.872,72.921 45.872,67.666 v1(46.228,67.31)
  L4 Bottom Layer w0.203: v1(23.86,73.46) 25.507,71.813 36.235,71.813 38.463,74.041 44.753,74.041 v1(45.865,72.929) ; v1(46.228,67.31) 46.582,66.956 46.582,64.911 46.609,64.885 46.609,64.866 47.294,64.182 v1(47.294,63.542)
RF_SW_CPLR_5.C1_LV: R527.2 R532.1 U506.2 | length 2
  L1 Top Layer w0.203: U506.2@34.122,33.294 34.378,33.55 R527.2@35.009,33.55 ; R532.1@35.045,32.569 R527.2@35.045,33.585
RF_SW_CPLR_5.C2: C516.2 R245.2 R528.1 | length 80.5
  L1 Top Layer w0.203: C516.2@24.892,75.479 v1(24.892,76.114) R245.2@24.892,76.749 ; R528.1@35.945,30.537 35.951,30.531 36.403,30.531 v1(36.409,30.525)
  L2 Inner 1 w0.203: v1(24.892,73.46) v1(24.892,76.114)
  L3 Inner 2 w0.203: v1(36.409,30.525) 36.987,31.103 36.987,33.445 35.19,35.242 35.19,52.633 36.151,53.594 38.792,53.594 43.052,57.854 43.052,58.769 45.023,60.74 45.938,60.74 47.798,62.6 47.798,63.661 47.98,63.843 47.98,63.987 v1(48.027,64.034) ; v1(46.867,73.057) 46.867,73.028 47.836,72.058 47.836,71.369 47.836,69.845 47.836,69.172 v1(46.99,68.326)
  L4 Bottom Layer w0.203: v1(24.892,73.46) 26.158,72.194 36.077,72.194 38.305,74.422 45.517,74.422 v1@46.867,73.073 ; v1(46.99,68.326) 46.99,65.024 48.006,64.008 48.006,64.013 v1(48.027,64.034)
RF_SW_CPLR_5.C2_LV: R528.2 R534.1 U506.1 | length 3
  L1 Top Layer w0.203: U506.1@33.899,32.886 34.121,32.886 34.124,32.883 34.433,32.573 34.433,32.165 R534.1@35.045,31.553 R528.2@35.045,30.537
RF_SW_CPLR_6.C1: C517.2 R242.2 R525.1 | length 145.3
  L1 Top Layer w0.203: v1(13.462,75.438) 12.334,74.31 12.334,35.895 19.273,28.956 v1(19.304,28.956) ; C517.2@21.844,75.479 v1(21.844,76.114) R242.2@21.844,76.749 ; v1(83.009,28.897) R525.1@83.422,28.897
  L2 Inner 1 w0.203: v1@78.408,15.498 78.408,16.187 77.348,17.247 77.048,17.247 76.637,17.658 76.637,18.321 76.029,18.928 76.029,23.491 78.279,25.74 79.657,25.74 82.767,28.849 82.962,28.849 v1(83.009,28.897)
  L3 Inner 2 w0.203: v1(19.304,28.956) 19.353,28.956 19.857,28.452 20.38,28.452 25.21,23.622 32.523,23.622 36.831,19.314 38.268,19.314 38.28,19.302 38.311,19.302 44.033,13.58 63.966,13.58 65.426,15.04 77.949,15.04 v1(78.397,15.487)
  L4 Bottom Layer w0.203: v1(13.462,75.438) 14.744,76.72 21.238,76.72 v1(21.844,76.114)
RF_SW_CPLR_6.C1_LV: R525.2 R531.1 U505.2 | length 2.3
  L1 Top Layer w0.203: R531.1@84.322,29.913 R525.2@84.322,28.897 84.358,28.932 84.988,28.932 85.244,29.188 85.244,29.194 85.246,29.196 U505.2@85.467,29.196
RF_SW_CPLR_6.C2: C515.2 R243.2 R526.1 | length 147.5
  L1 Top Layer w0.203: v1(13.462,74.676) 12.715,73.929 12.715,36.307 v1(20.066,28.956) ; C515.2@22.86,75.479 v1(22.86,76.114) R243.2@22.86,76.749 ; R526.1@83.422,31.945 83.519,32.042 83.519,32.465 v1(83.566,32.512)
  L2 Inner 1 w0.203: v1(77.692,15.544) 77.692,16.364 77.19,16.866 76.89,16.866 76.256,17.5 76.256,18.163 75.648,18.77 75.648,23.648 78.121,26.121 79.5,26.121 82.91,29.531 82.91,31.856 v1(83.566,32.512)
  L3 Inner 2 w0.203: v1(20.066,28.956) 20.415,28.956 25.368,24.003 32.681,24.003 36.989,19.695 38.457,19.695 44.191,13.961 63.808,13.961 65.268,15.421 77.502,15.421 77.625,15.544 v1(77.692,15.544)
  L4 Bottom Layer w0.203: v1(13.462,74.676) 14.36,75.574 22.32,75.574 v1(22.86,76.114)
RF_SW_CPLR_6.C2_LV: R526.2 R533.1 U505.1 | length 3
  L1 Top Layer w0.203: R526.2@84.322,31.945 R533.1@84.322,30.929 85.12,30.13 85.12,29.715 85.239,29.596 U505.1@85.467,29.596
RF_SW_Impedance.C1: C603.2 R254.2 R601.2 R603.2 | length 166.4
  L1 Top Layer w0.203: v1(10.414,80.264) 10.048,79.898 10.048,33.64 v1(17.018,26.67) ; C603.2@19.928,83.142 19.937,83.151 20.358,83.151 v1(20.367,83.159) 20.376,83.151 20.935,83.151 R254.2@20.944,83.142 ; v1(28.932,12.486) 29.347,12.901 R603.2@29.347,13.503 ; v1(101.346,12.7) R601.2@101.346,13.484
  L3 Inner 2 w0.203: v1(17.018,26.67) 17.065,26.623 17.065,26.396 24.861,18.6 24.861,13.971 26.346,12.486 v1(28.932,12.486) 40.395,12.486 43.396,9.486 77.509,9.486 78.502,10.479 99.125,10.479 v1(101.346,12.7)
  L4 Bottom Layer w0.203: v1(10.414,80.264) 13.35,83.2 20.326,83.2 v1(20.367,83.159)
RF_SW_Impedance.C2: C604.2 R255.2 R602.2 R604.2 | length 161
  L1 Top Layer w0.203: v1(11.176,80.264) 10.429,79.517 10.429,34.021 v1(17.78,26.67) ; C604.2@19.928,82.126 19.937,82.135 20.358,82.135 v1(20.367,82.143) 20.376,82.135 20.935,82.135 R255.2@20.944,82.126 ; v1(26.04,13.506) 26.044,13.502 26.527,13.502 R604.2@26.531,13.499 ; R602.2@98.531,13.485 98.541,13.474 98.541,12.711 v1(98.552,12.7)
  L3 Inner 2 w0.203: v1(17.78,26.67) 17.827,26.623 17.827,26.173 25.242,18.758 25.242,14.337 26.04,13.539 v1(26.04,13.506) 26.071,13.536 39.884,13.536 43.554,9.867 77.282,9.867 78.29,10.875 96.727,10.875 v1(98.552,12.7)
  L4 Bottom Layer w0.203: v1(11.176,80.264) 13.055,82.143 v1(20.367,82.143)
RF_SW_LPF_1.C1: C324.2 R214.1 R312.1 | length 65.4
  L1 Top Layer w0.203: C324.2@78.994,84.761 v1(78.994,85.269) R214.1@78.994,85.777 ; v1(104.076,64.616) 104.079,64.612 R312.1@104.079,64.124
  L2 Inner 1 w0.203: v1(78.994,85.269) 81.41,82.853 99.804,82.853 102.321,80.336 107.786,80.336 117.12,71.002 117.12,65.843 v1(117.667,65.296)
  L4 Bottom Layer w0.203: v1(104.076,64.616) 104.495,65.035 117.406,65.035 v1(117.667,65.296)
RF_SW_LPF_1.C2: C323.2 R215.1 R313.1 | length 65.2
  L1 Top Layer w0.203: C323.2@77.978,84.761 v1(77.978,85.269) R215.1@77.978,85.777 ; v1(105.041,64.531) 105.068,64.504 105.068,64.151 R313.1@105.095,64.124
  L2 Inner 1 w0.203: v1(77.978,85.269) 80.79,82.457 99.661,82.457 102.163,79.955 105.762,79.955 109.46,76.256 111.326,76.256 116.739,70.844 116.739,65.231 v1(117.457,64.512)
  L4 Bottom Layer w0.203: v1(105.041,64.531) 117.438,64.531 v1(117.457,64.512)
RF_SW_LPF_2.C1: C327.2 R212.1 R317.1 | length 62.7
  L1 Top Layer w0.203: C327.2@81.026,84.761 v1(81.026,85.269) R212.1@81.026,85.777 ; v1(104.075,67.693) 104.079,67.698 R317.1@104.079,68.179
  L2 Inner 1 w0.203: v1(81.026,85.269) 82.669,83.626 100.108,83.626 102.637,81.098 108.101,81.098 117.882,71.317 117.882,67.639 v1(118.241,67.28)
  L4 Bottom Layer w0.203: v1(104.075,67.693) 104.462,67.306 118.214,67.306 v1(118.241,67.28)
RF_SW_LPF_2.C2: C326.2 R213.1 R318.1 | length 65.2
  L1 Top Layer w0.203: C326.2@80.01,84.761 v1(80.01,85.269) R213.1@80.01,85.777 ; R318.1@103.063,68.179 103.063,67.683 v1(103.093,67.653)
  L2 Inner 1 w0.203: v1(80.01,85.269) 82.036,83.243 99.953,83.243 102.479,80.717 107.944,80.717 117.501,71.159 117.501,66.699 v1(117.812,66.388)
  L4 Bottom Layer w0.203: v1(103.093,67.653) 104.525,66.221 117.579,66.221 117.746,66.388 v1(117.812,66.388)
RF_SW_PORT.C1: C423.2 R240.2 R410.2 R412.2 | length 56
  L1 Top Layer w0.203: C423.2@20.828,75.479 v1(20.828,76.114) R240.2@20.828,76.749 ; v1(55.31,70.98) R410.2@55.31,71.293
  L1 Top Layer w0.254: v1(58.517,59.497) R412.2@58.517,59.947
  L2 Inner 1 w0.203: v1(20.661,73.864) 20.689,73.892 20.689,75.908 20.828,76.047 v1(20.828,76.114)
  L3 Inner 2 w0.203: v1(20.661,73.864) 22.026,75.229 31.355,75.229 31.82,75.694 37.922,75.694 38.102,75.874 46.571,75.874 46.705,75.74 50.964,75.74 52.612,74.092 52.612,73.9 v1(52.659,73.853) ; v1(55.31,70.98) 54.866,70.98 54.375,70.489 54.375,63.603 58.481,59.497 v1(58.517,59.497)
  L4 Bottom Layer w0.203: v1(52.659,73.853) 55.263,71.249 55.263,71.027 v1(55.31,70.98)
RF_SW_PORT.C2: C424.2 R239.2 R411.2 R413.2 | length 53.5
  L1 Top Layer w0.203: C424.2@19.812,75.479 v1(19.812,76.117) R239.2@19.812,76.749 ; R413.2@49.165,66.505 49.165,65.95 v1(49.583,65.532) ; R411.2@55.31,72.309 55.313,72.306 55.313,71.999 v1(55.316,71.996)
  L2 Inner 1 w0.203: v1(19.812,73.858) v1(19.812,76.117)
  L3 Inner 2 w0.203: v1(19.812,73.858) 21.563,75.61 31.197,75.61 31.662,76.075 37.764,76.075 37.944,76.255 46.729,76.255 46.863,76.121 51.122,76.121 52.993,74.25 52.993,74.233 53.346,73.88 v1(53.4,73.88) ; v1(49.583,65.532) 52.025,65.532 53.994,67.502 53.994,70.712 55.278,71.996 v1(55.316,71.996)
  L4 Bottom Layer w0.203: v1(53.4,73.88) 55.284,71.996 v1@55.304,71.996
RUN: R201.1 U202.35 | length 20.4
  L1 Top Layer w0.203: U202.35@31.691,83.035 33.672,83.035 34.157,82.55 38.494,82.55 39.223,83.278 v1(39.223,83.306) ; v1(43.917,92.042) 43.964,92.09 43.964,92.616 R201.1@44.058,92.71
  L4 Bottom Layer w0.203: v1(39.223,83.306) 39.223,83.373 39.487,83.637 39.487,86.872 40.99,88.375 42.527,88.375 42.564,88.412 43.917,89.765 v1(43.917,92.042)
SDI_Test_Button: R228.1 S203.2 U202.26 | length 27.8
  L1 Top Layer w0.203: S203.2@14.26,91.08 15.722,92.542 19.303,92.542 22.429,89.416 22.429,87.749 R228.1@22.606,87.572 28.075,87.572 29.144,88.641 29.144,88.649 29.652,89.157 v1(32.292,89.157) ; U202.26@31.691,86.635 32.205,86.635 32.289,86.72 32.703,86.72 33.05,86.373 33.05,86.042 v1(33.098,85.995)
  L3 Inner 2 w0.203: v1(32.292,89.157) 32.292,87.19 33.104,86.378 33.104,86.001 v1(33.098,85.995)
SDI_Test_Fail: R222.2 U202.28 | length 16.4
  L1 Top Layer w0.203: R222.2@24.326,89.662 24.524,89.464 24.524,89.368 25.506,88.386 27.729,88.386 29.279,89.937 30.799,89.937 31.656,89.937 v1(32.33,90.611) ; U202.28@31.691,85.835 31.693,85.834 32.191,85.834 32.453,85.571 v1(32.52,85.571)
  L3 Inner 2 w0.203: v1(32.33,90.611) 31.391,89.672 31.391,86.638 32.458,85.571 v1(32.52,85.571)
SDI_Test_Pass: R223.2 U202.27 | length 13.8
  L1 Top Layer w0.203: R223.2@24.408,88.417 24.527,88.298 24.819,88.005 27.929,88.005 29.479,89.556 30.799,89.556 31.995,89.556 32.294,89.855 v1(32.294,89.865) ; U202.27@31.691,86.235 31.693,86.237 32.49,86.237 v1(32.494,86.241)
  L3 Inner 2 w0.203: v1(32.294,89.865) 32.294,89.844 31.785,89.335 31.785,86.951 v1(32.494,86.241)
SWCLK: D201.2 J202.1 R266.1 | length 3.5
  L1 Top Layer w0.203: J202.1@26.903,93.075 26.903,89.854 R266.1@27.102,89.655
SWDIO: D202.2 J202.3 R265.1 | length 3.6
  L1 Top Layer w0.203: J202.3@24.903,93.075 24.903,90.03 R265.1@25.279,89.653
USB_D_N: D203.2 J201.A7 J201.B7 R256.2 | length 22.4
  L1 Top Layer w0.228: R256.2@45.642,84.839 45.929,85.126 58.406,85.126 61.023,87.743 61.023,88.222 61.156,88.356 61.178,88.356 D203.2@61.214,88.392 61.178,88.428 61.156,88.428 61.023,88.562 61.023,89.53 60.69,89.863 60.69,90.621 ; J201.A7@60.75,91.388 60.715,91.352 60.715,90.646 60.69,90.621 ; J201.B7@61.75,91.388 61.715,91.352 61.715,90.752 61.509,90.547 60.764,90.547 60.69,90.621
USB_D_P: D204.2 J201.A6 J201.B6 R257.2 | length 22.4
  L1 Top Layer w0.228: R257.2@45.642,85.826 45.962,85.506 58.248,85.506 60.643,87.901 60.643,88.222 60.51,88.356 60.488,88.356 D204.2@60.452,88.392 60.488,88.428 60.51,88.428 60.643,88.562 60.643,89.373 60.31,89.706 60.31,90.621 60.285,90.646 60.285,91.352 J201.B6@60.25,91.388 60.285,91.423 60.285,92.015 60.335,92.064 60.335,92.073 60.491,92.229 61.009,92.229 61.215,92.023 61.215,91.423 J201.A6@61.25,91.388
USB_D_TER_N: R256.1 U202.66 | length 4.3
  L1 Top Layer w0.228: U202.66@41.591,83.035 41.601,83.045 42.294,83.045 42.564,83.315 43.314,84.065 43.314,84.299 44.157,85.143 44.439,85.143 R256.1@44.742,84.839
USB_D_TER_P: R257.1 U202.67 | length 4.3
  L1 Top Layer w0.228: U202.67@41.591,83.435 41.601,83.425 42.137,83.425 42.564,83.853 42.934,84.222 42.934,84.457 44,85.523 44.439,85.523 R257.1@44.742,85.826
XIN: C202.2 U202.30 Y201.1 | length 7.4
  L1 Top Layer w0.203: Y201.1@24.92,86.374 24.92,86.249 25.771,85.398 28.194,85.398 29.667,85.398 30.03,85.035 30.799,85.035 U202.30@31.691,85.035
XOUT: R203.1 U202.31 | length 3.2
  L1 Top Layer w0.203: R203.1@29.21,83.428 29.408,83.626 29.504,83.626 29.789,83.912 29.789,84.32 30.104,84.635 30.799,84.635 U202.31@31.691,84.635
pads on no net: FB3.1 J201.A8 J201.B8 S201.0 S202.0 U102.1 U103.5 U104.5 U105.5 U107.4 U108.4 U109.4 U301.14 U301.15 U404.3 U405.13 U507.13

## Polygon pours and split planes (outlines as drawn)
GND on L3 Inner 2 "GND_L03_P034" (solid, remove dead copper, pour order 34): 0,0 122,0 122,98 0,98
3.3V on L3 Inner 2 "3.3V_L03_P030" (solid, remove dead copper, pour order 30): 12.192,26.924 11.938,26.67 11.938,25.654 17.272,20.32 17.272,17.018 27.94,6.35 50.546,6.35 52.578,4.318 62.376,4.318 63.754,5.696 63.754,8.034 62.464,9.324 43.254,9.324 40.386,12.192 26.416,12.192 24.638,13.97 24.638,17.526 15.24,26.924
"3.3V RF SW." on L3 Inner 2 "L3 GND Inner 2-3.3V RF SW." (solid, remove dead copper, pour order 25): 42.672,50.038 43.434,49.276 53.086,49.276 63.896,60.086 64.882,60.086 65.348,59.62 65.348,58.723 64.335,57.71 64.335,55.783 64.97,55.148 79.352,55.148 83.566,50.934 83.566,32.19 83.566,27.85 83.042,27.326 83.042,26.169 83.257,25.955 83.556,25.955 85.373,27.772 87.122,27.772 87.122,21.974 80.896,15.748 72.474,15.748 70.923,14.196 70.923,12.897 72.644,11.176 102.87,11.176 105.155,13.461 105.157,15.027 103.987,16.002 95.946,16.002 93.577,18.371 93.577,30.47 88.903,35.144 88.903,52.321 78.486,62.738 72.311,62.738 67.818,67.231 67.818,74.422 63.754,74.422 63.754,62.738 59.739,58.723 44.245,58.723 42.672,57.15
6V on L3 Inner 2 "6V_L03_P006" (solid, remove dead copper, pour order 6): 59.349,79.163 40.178,59.986 35.676,59.986 35.676,57.052 40.013,57.052 57.46,74.5 103.5,74.5 107.5,70.5 107.5,27 109.5,25 114.5,25 116.5,27 116.5,91.5 115,93 112,93 110.5,91.5 110.5,85 104.663,79.163
"3.3V RF SW." on L3 Inner 2 "3.3V_RF_SW._L03_P020" (solid, remove dead copper, pour order 20): 36.78,42.672 37.588,42.672 39.698,40.596 39.698,29.538 37.592,27.432 36.83,27.432 35.5,28.762 37.282,30.544 37.282,33.56 35.5,35.342 35.5,41.392
"3.3V RF SW." on L3 Inner 2 "3.3V_RF_SW._L03_P022" (solid, remove dead copper, pour order 22): 33.02,20.574 32.258,20.574 32.004,20.32 32.004,14.513 32.547,13.97 33.274,13.97 33.782,14.478 33.782,19.812
5V on L3 Inner 2 "5V_L03_P008" (solid, remove dead copper, pour order 8): 69.5,93.5 69.5,90.737 71.237,89 75,89 78,92 90.067,92 96.749,85.319 108.607,85.319 110.124,86.836 110.124,91.876 105,97 73,97
GND on L4 Bottom Layer "GND_L04_P028" (solid, remove dead copper, pour order 28): 0,0 122,0 122,98 0,98
3.3V on L4 Bottom Layer "3.3V_L04_P026" (solid, remove dead copper, pour order 26): 87.172,92.152 84.836,94.488 13.97,94.488 8.382,88.9 8.382,29.21 11.43,26.162 14.986,26.162 15.24,26.416 15.24,26.924 12.192,29.972 12.192,61.976 24.13,73.914 32.783,73.914 36.085,77.216 45.466,77.216 49.022,80.772 59.424,80.772 62.738,84.086 83.578,84.086 87.172,87.68
"3.3V RF SW." on L4 Bottom Layer "3.3V_RF_SW._L04_P005" (solid, remove dead copper, pour order 5): 46.102,58.294 46.102,58.529 40.64,63.991 40.64,64.486 40.337,64.788 40.05,64.788 39.881,64.619 39.881,62.735 44.667,57.949 45.757,57.949
GND on L2 Inner 1 "GND_L02_P024" (solid, remove dead copper, pour order 24): 0,0 122,0 122,98 0,98
"3.3V RF SW." on L2 Inner 1 "3.3V_RF_SW._L02_P015" (solid, remove dead copper, pour order 15): 44.073,52.512 44.704,51.881 44.704,48.26 38.608,42.164 38.608,41.402 37.338,40.132 36.83,40.132 36.576,40.386 36.576,46.736 42.352,52.512
"3.3V RF SW." on L2 Inner 1 "3.3V_RF_SW._L02_P023" (solid, remove dead copper, pour order 23): 35.56,28.702 36.83,29.972 37.338,29.972 38.354,28.956 38.354,23.876 33.528,19.05 32.512,19.05 32.004,19.558 32.004,21.844 35.56,25.4
GND on L1 Top Layer "GND_L01_P033" (solid, remove dead copper, pour order 33): 0,0 122,0 122,98 0,98

## Keep-outs
L1 Top Layer:
  rectangle: 3.556,50.678 9.144,86.238
  lines w0.025: 3.556,50.678 3.556,86.238 9.144,86.238 9.144,50.678 3.556,50.678
L4 Bottom Layer:
  lines w0.1: 74.995,94.524 ccw(c76.5,95.25) 77.994,94.502

## Other copper
L1 Top Layer:
  region: 1071 vertices and 1 holes, not listed, extent 5.628,70.419 8.501,72.455
  region: 5.195,71.971 5.195,72.926 5.203,72.926 5.203,72.942 5.211,72.942 5.211,72.95 5.219,72.95 5.219,72.958 5.227,72.958 5.227,72.965 5.234,72.965 5.234,72.973 5.242,72.973 5.242,72.981 5.266,72.981 5.266,72.989 5.313,72.989 5.313,72.981 5.328,72.981 5.328,72.973 5.344,72.973 5.344,72.965 5.352,72.965 5.352,72.958 5.36,72.958 5.36,72.942 5.367,72.942 5.367,72.934 5.375,72.934 5.375,70.366 5.367,70.366 5.367,70.351 5.36,70.351 5.36,70.343 5.352,70.343 5.352,70.335 5.344,70.335 5.344,70.327 5.328,70.327 5.328,70.319 5.313,70.319 5.313,70.311 5.266,70.311 5.266,70.319 5.242,70.319 5.242,70.327 5.234,70.327 5.234,70.335 5.227,70.335 5.227,70.343 5.219,70.343 5.219,70.351 5.211,70.351 5.211,70.358 5.203,70.358 5.203,70.374 5.195,70.374 5.195,71.963
  region net GND: 93.982,87.146 94.36,87.204 95.009,87.811 96.696,87.811 96.696,86.134 95.542,85.011 94.54,85.011 94.54,86.022 93.925,86.976
  region: 4.904,71.693 4.911,71.693 4.911,71.701 4.927,71.701 4.927,71.708 4.943,71.708 4.943,71.716 4.982,71.716 4.982,71.708 5.005,71.708 5.005,71.701 5.013,71.701 5.013,71.693 5.021,71.693 5.021,71.685 5.029,71.685 5.029,71.677 5.037,71.677 5.037,71.646 5.044,71.646 5.044,71.63 5.037,71.63 5.037,71.607 5.029,71.607 5.029,71.591 5.021,71.591 5.021,71.583 5.013,71.583 5.013,71.575 4.997,71.575 4.997,71.567 4.966,71.567 4.966,71.56 4.958,71.56 4.958,71.567 4.935,71.567 4.935,71.575 4.919,71.575 4.919,71.583 4.911,71.583 4.911,71.591 4.904,71.591 4.904,71.599 4.896,71.599 4.896,71.614 4.888,71.614 4.888,71.661 4.896,71.661 4.896,71.685 4.904,71.685
  region: 120 vertices and 1 holes, not listed, extent 4.262,70.432 5.044,70.894
  region: 117 vertices and 1 holes, not listed, extent 4.262,70.98 5.044,71.442
  region: 4.669,71.701 4.794,71.701 4.794,71.693 4.802,71.693 4.802,71.646 4.81,71.646 4.81,71.607 4.817,71.607 4.817,71.583 4.269,71.583 4.269,71.701 4.661,71.701
  region: 278 vertices and 1 holes, not listed, extent 4.066,71.763 4.825,72.296
  region net 5V: 93.945,87.497 94.103,87.523 94.386,87.806 94.386,88.556 95.086,88.556 95.214,88.428 95.214,88.309 94.252,87.373 93.954,87.332
  region net 3.3V: 86.433,89.081 86.433,90.367 87.172,91.106 87.172,91.619 87.003,91.787 84.692,91.787 84.273,91.369 84.273,89.446 84.638,89.081 86.419,89.081
  region net "3.3V RF SW.": 64.563,74.93 64.304,74.671 64.304,73.614 64.096,73.406 63.5,73.406 63.5,72.644 63.754,72.39 67.564,72.39 67.818,72.644 67.818,73.914 67.564,74.168 66.358,74.168 65.596,74.93
  region net 6V: 35.704,55.55 36.235,55.55 36.682,55.997 36.682,56.603 36.228,57.056 36.225,57.053 35.704,57.053 35.704,59.662 36.028,59.986 36.717,59.986 37.189,59.514 37.189,55.838 36.501,55.15
  region net 5V: 70.837,90.678 70.837,92.394 70.943,92.5 72.056,92.5 72.238,92.682 74.801,92.682 75.533,91.951 75.533,91.002 74.18,91.002 73.688,91.494 72.566,91.494 71.622,90.549 70.97,90.549 70.841,90.678
  region net 5V: 94.783,88.816 94.95,88.982 94.95,90.298 95.431,90.779 96.722,90.779 97.221,90.28 97.221,88.963 96.573,88.315 94.777,88.315
  region net 5V: 107.427,90.069 107.427,91.927 108,92.5 108,93.5 107.5,94 106.5,94 105.932,93.432 105.932,90.568 106.5,90
  region net 6V: 82.263,75.669 82.265,75.667 83.142,75.667 83.683,76.208 83.683,76.776 84.145,77.238 85.382,77.238 85.547,77.403 85.547,78.53 84.838,79.238 82.959,79.238 82.25,78.53 82.251,78.529 82.251,77.571 82.764,77.571 83.248,77.088 83.248,76.531 82.782,76.066 82.263,76.066
  region net 6V: 113.358,28.099 113.354,28.096 111.109,28.096 111.109,27.565 110.65,27.105 110.641,27.114 110.015,27.114 109.578,27.551 109.583,27.556 109.583,28.101 109.2,28.101 109.196,28.096 109.196,27.024 109.808,26.412 113.086,26.412 113.393,26.718 113.393,28.096
  region net 6V: 114.176,90.345 114.112,90.409 114.112,91.966 115.79,91.966 115.79,90.041 114.475,90.041 114.109,90.406
  region net 1.1V: 46.851,82.334 46.852,82.464 46.852,83.4 43.814,83.4 43.404,82.989 44.252,82.141 44.252,82.059 44.319,82.059 44.394,81.984 46.501,81.984
  region net 5V: 107.136,91.911 107.136,90.374 108.074,89.436 106.674,89.436
  region net 5V: 105.932,91.916 105.932,88.191 106.119,88.004 107.136,89.021 107.136,91.911
  region net NetC109_2: 110.674,88.356 110.674,89.908 111.095,90.328 111.095,91.803 111.687,92.395 113.109,92.395 113.63,91.874 113.63,90.154 113.998,89.786 114.572,89.786 114.575,89.783 114.572,89.779 114.572,88.356
  region net 5V: 104.692,87.463 104.692,88.202 105.828,88.202 106.174,88.547 106.174,89.797 109.979,89.797 109.98,89.796 109.98,87.465
  region net NetD101_1: 104.694,86.701 105.841,86.701 106.217,87.077 109.993,87.077 109.993,85.117 109.979,85.102 108.487,85.102 107.927,84.542 107.927,82.102 105.977,82.102 105.977,84.688 104.692,85.949
  region net NetC105_2: 110.449,82.466 110.449,87.086 114.678,87.086 114.678,85.815 113.99,85.127 113.99,83.677 112.779,82.466
  region net 5V: 93.527,87.715 93.2,88.042 93.2,88.487 93.638,88.487 93.642,88.492 93.644,88.49 93.644,87.852 93.671,87.825
  region net NetC108_2: 87.969,91.184 89.211,91.184 89.743,90.652 89.743,87.219 89.67,87.146 85.6,87.146 85.6,88.534 85.706,88.64 86.716,88.64 87.035,88.959 87.035,90.298 87.794,91.057
  region net NetC106_2: 93.682,87.028 94.033,86.184 94.033,85.225 93.098,84.29 85.35,84.29 85.35,86.175 85.706,86.532 90.254,86.532 90.596,86.874 93.269,86.874 93.515,87.121
  region net NetL102_1: 93.616,87.386 93.604,87.322 90.163,87.322 90.163,88.886 90.164,88.887 92.551,88.887 92.904,88.534 92.904,88.071 93.473,87.503 93.601,87.497
  text ".Layer_Name" at 37.689,-54.58 h1.8
L2 Inner 1:
  text ".Layer_Name" at 37.7,-54.6 h1.8
L3 Inner 2:
  text ".Layer_Name" at 37.7,-54.6 h1.8
L4 Bottom Layer:
  region net 1.1V: 44.761,83.096 44.751,83.086 44.751,82.526 44.927,82.526 44.961,82.493 44.962,82.494 44.962,83.125
  text ".Layer_Name" at 37.689,-54.58 h1.8

## Silkscreen, mask and mechanical layers (free items; w line width, h text height)
Top Solder 1:
  drawing of 120 lines, arcs and shapes, not listed
  text ".Layer_Name" at 37.689,-54.512 h1.8